# Altium PCB omnibothub-core.PcbDoc (part 1 of 2)
Units mil, origin at the board's own origin, x right, y up, seen from the top; angles counter-clockwise.
Board outline 2561.98 x 2230.57 mil, 4 copper layers (Top Layer, Mid-Layer 1, Mid-Layer 2, Bottom Layer); 77 components, 73 nets, 319 pads, 135 vias.
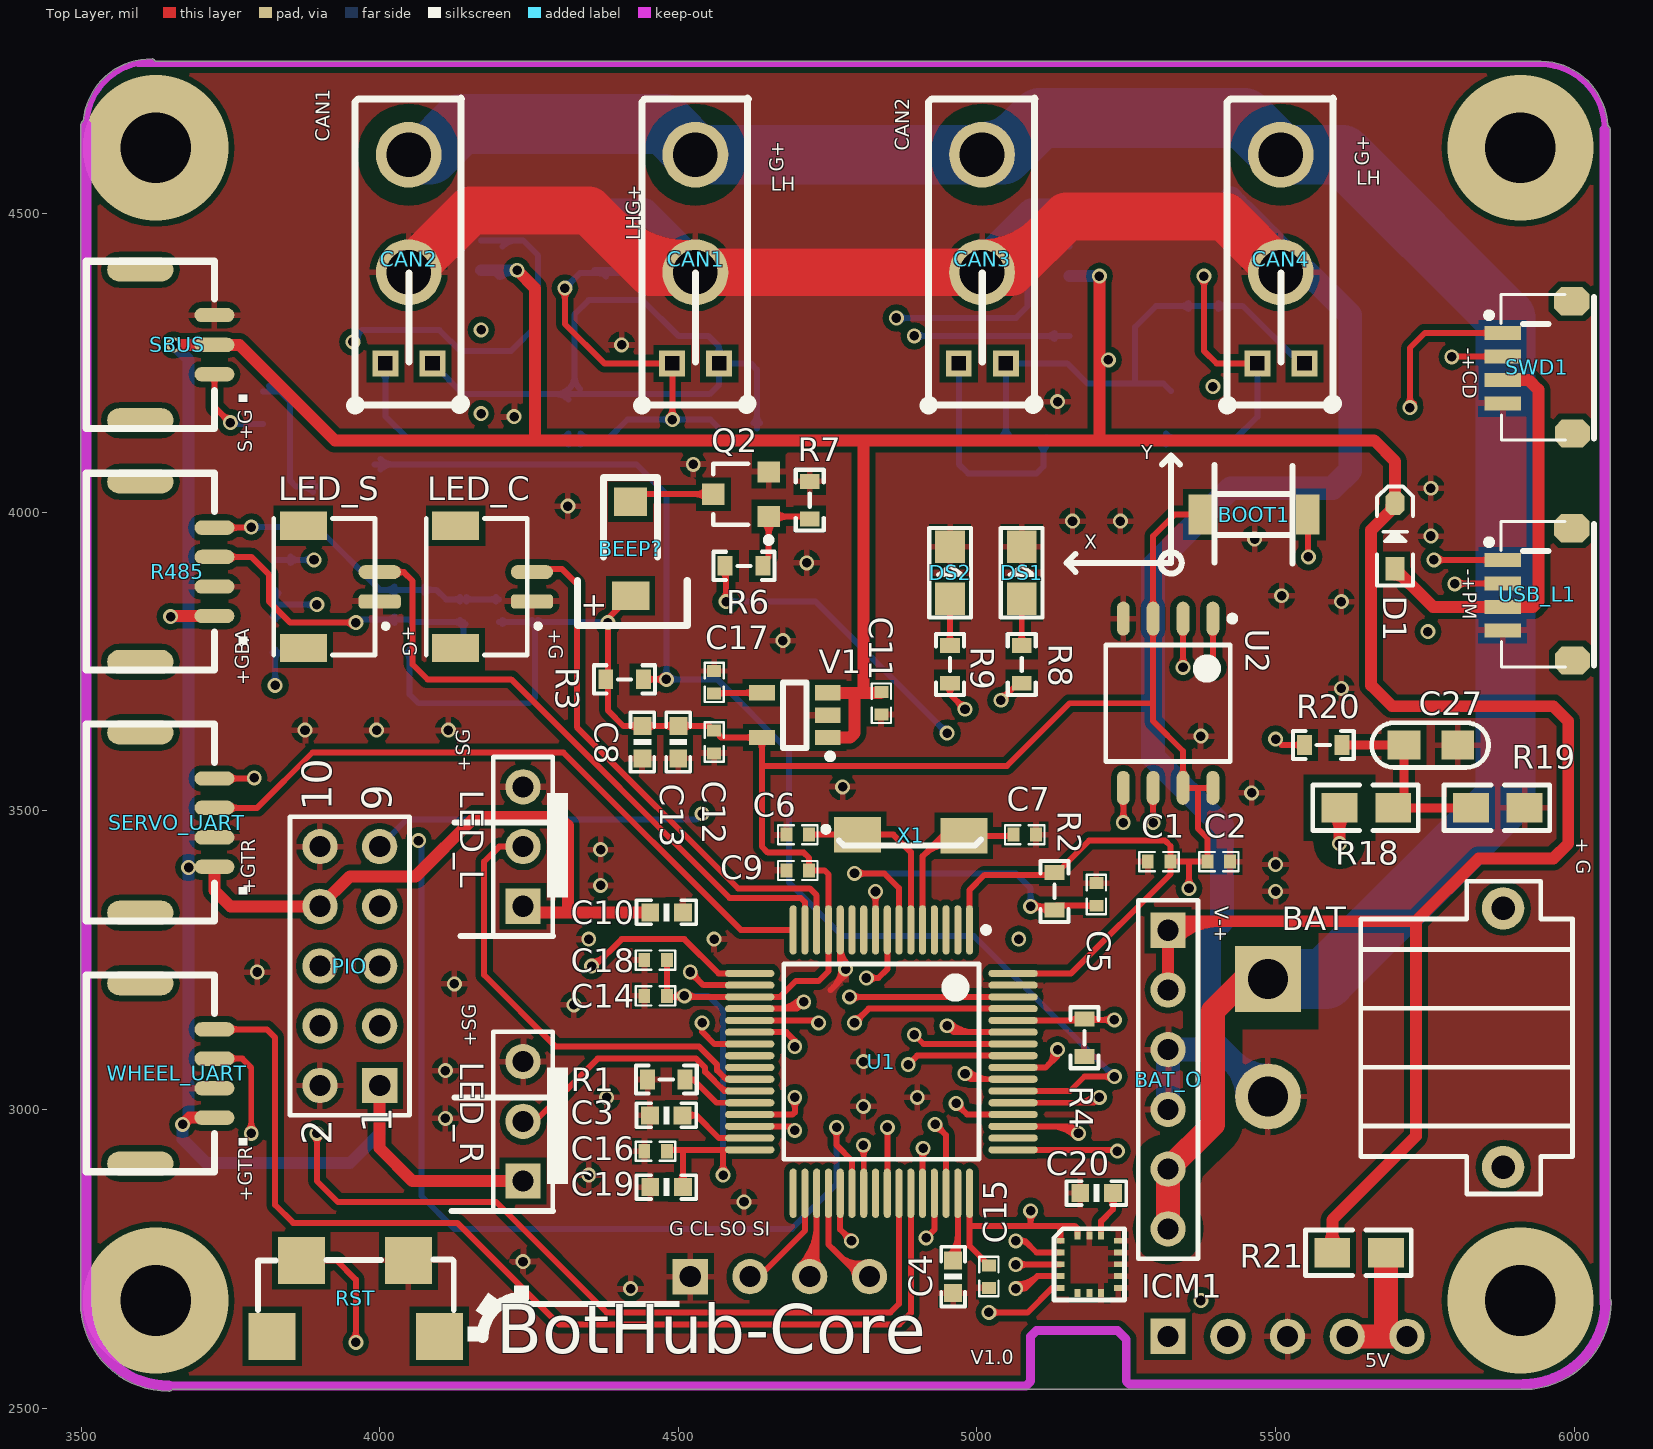
[diagram p0: Top Layer view]
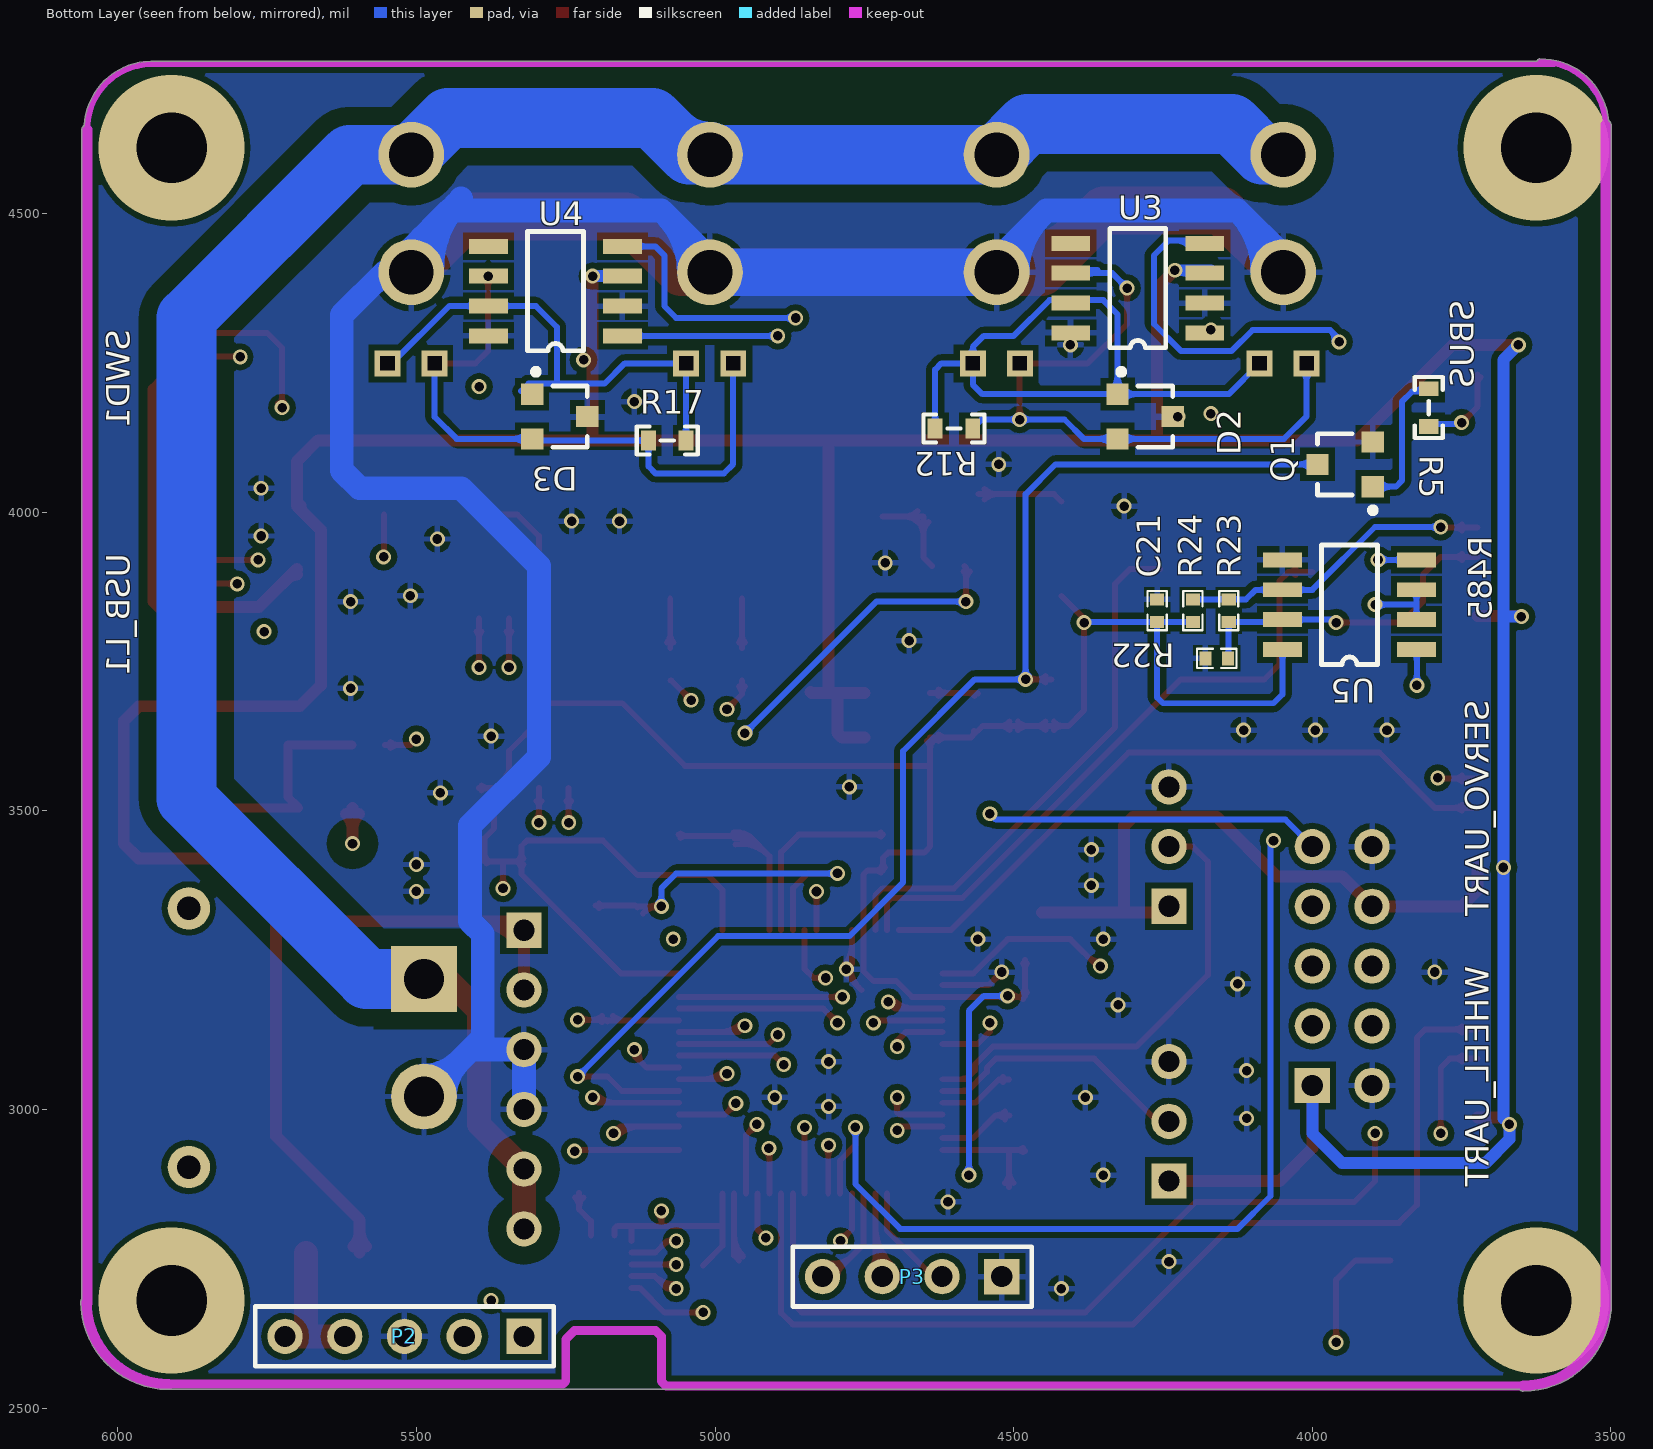
[diagram p1: Bottom Layer view, seen from below]
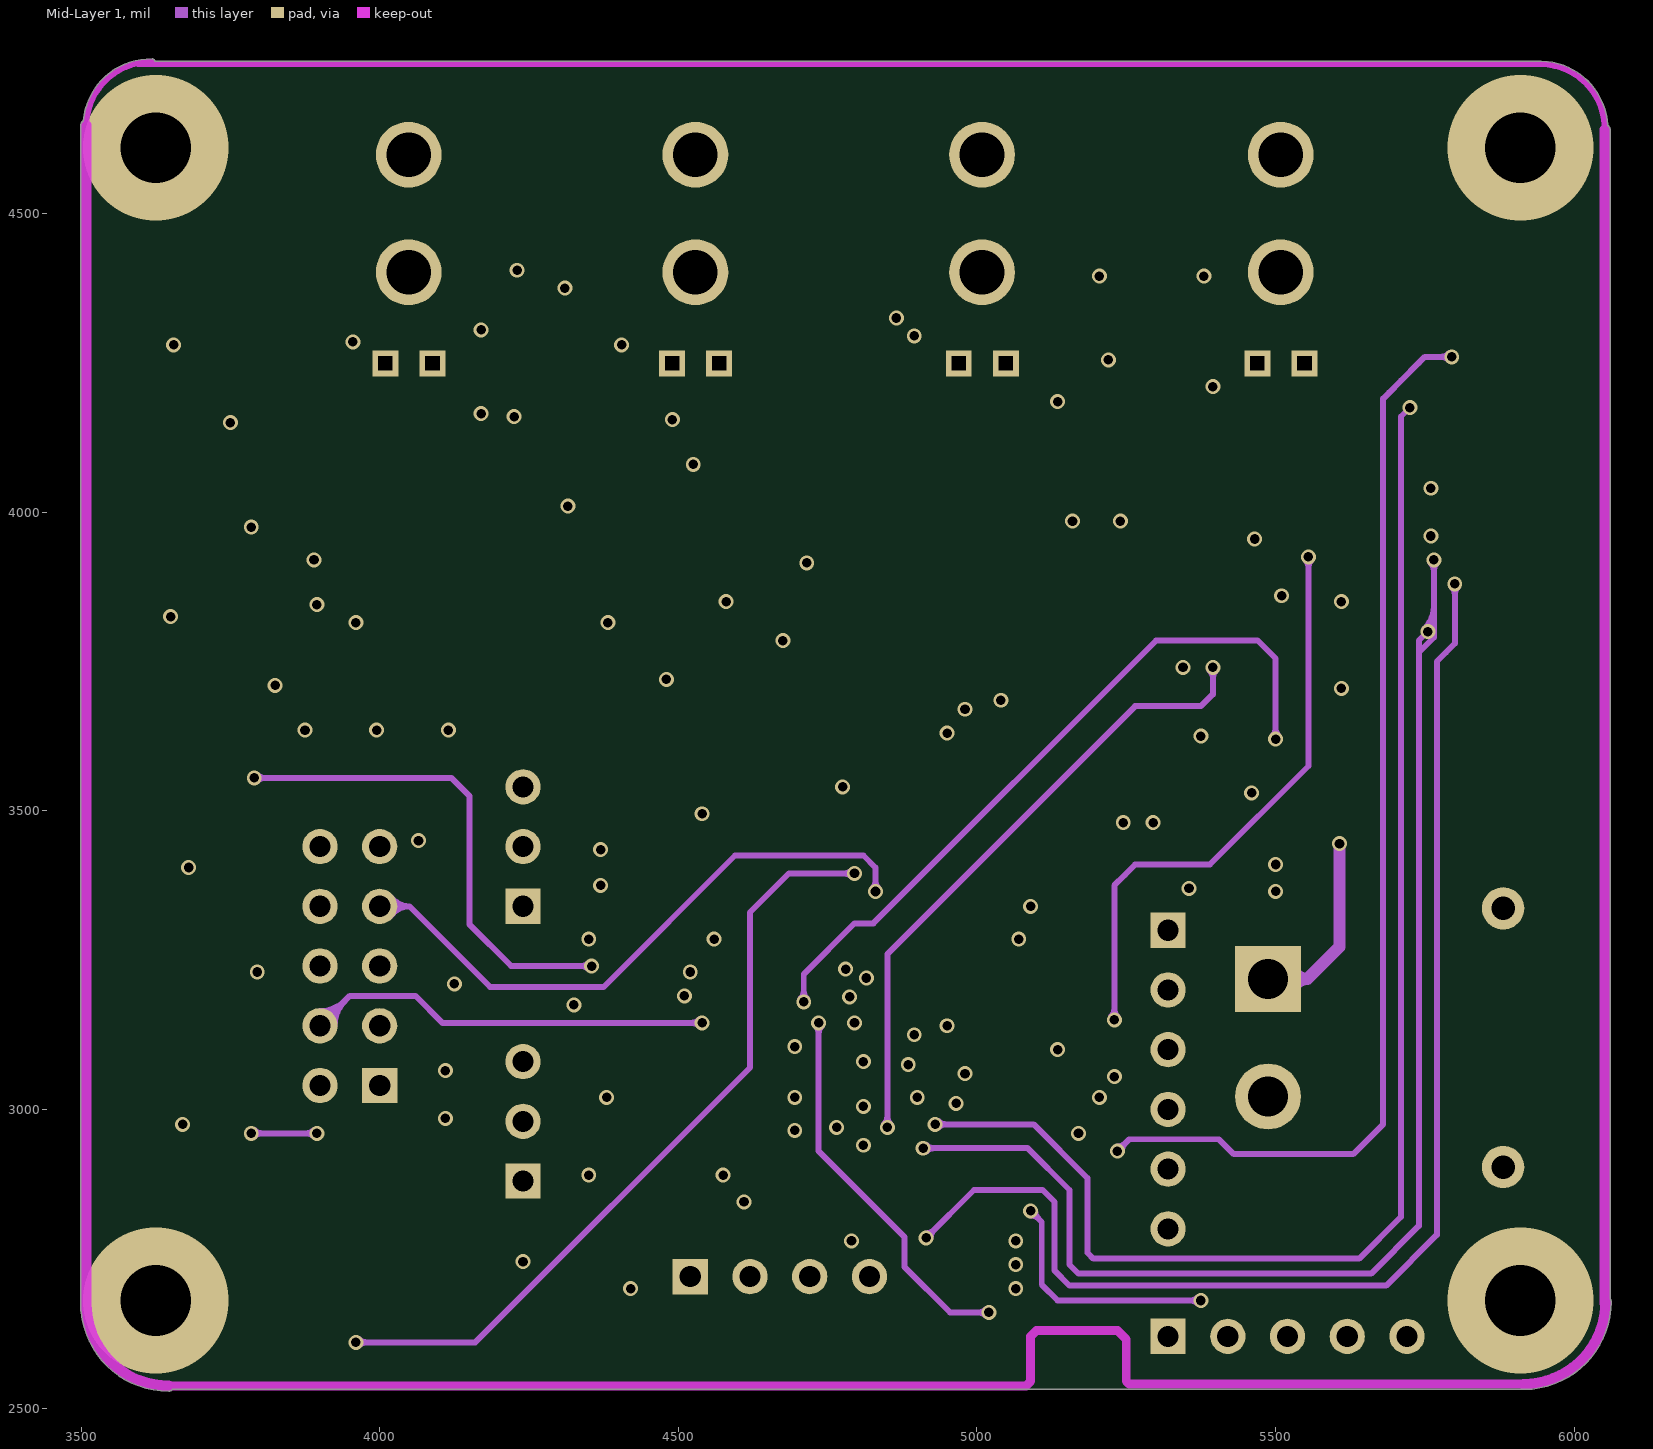
[diagram p2: Mid-Layer 1]
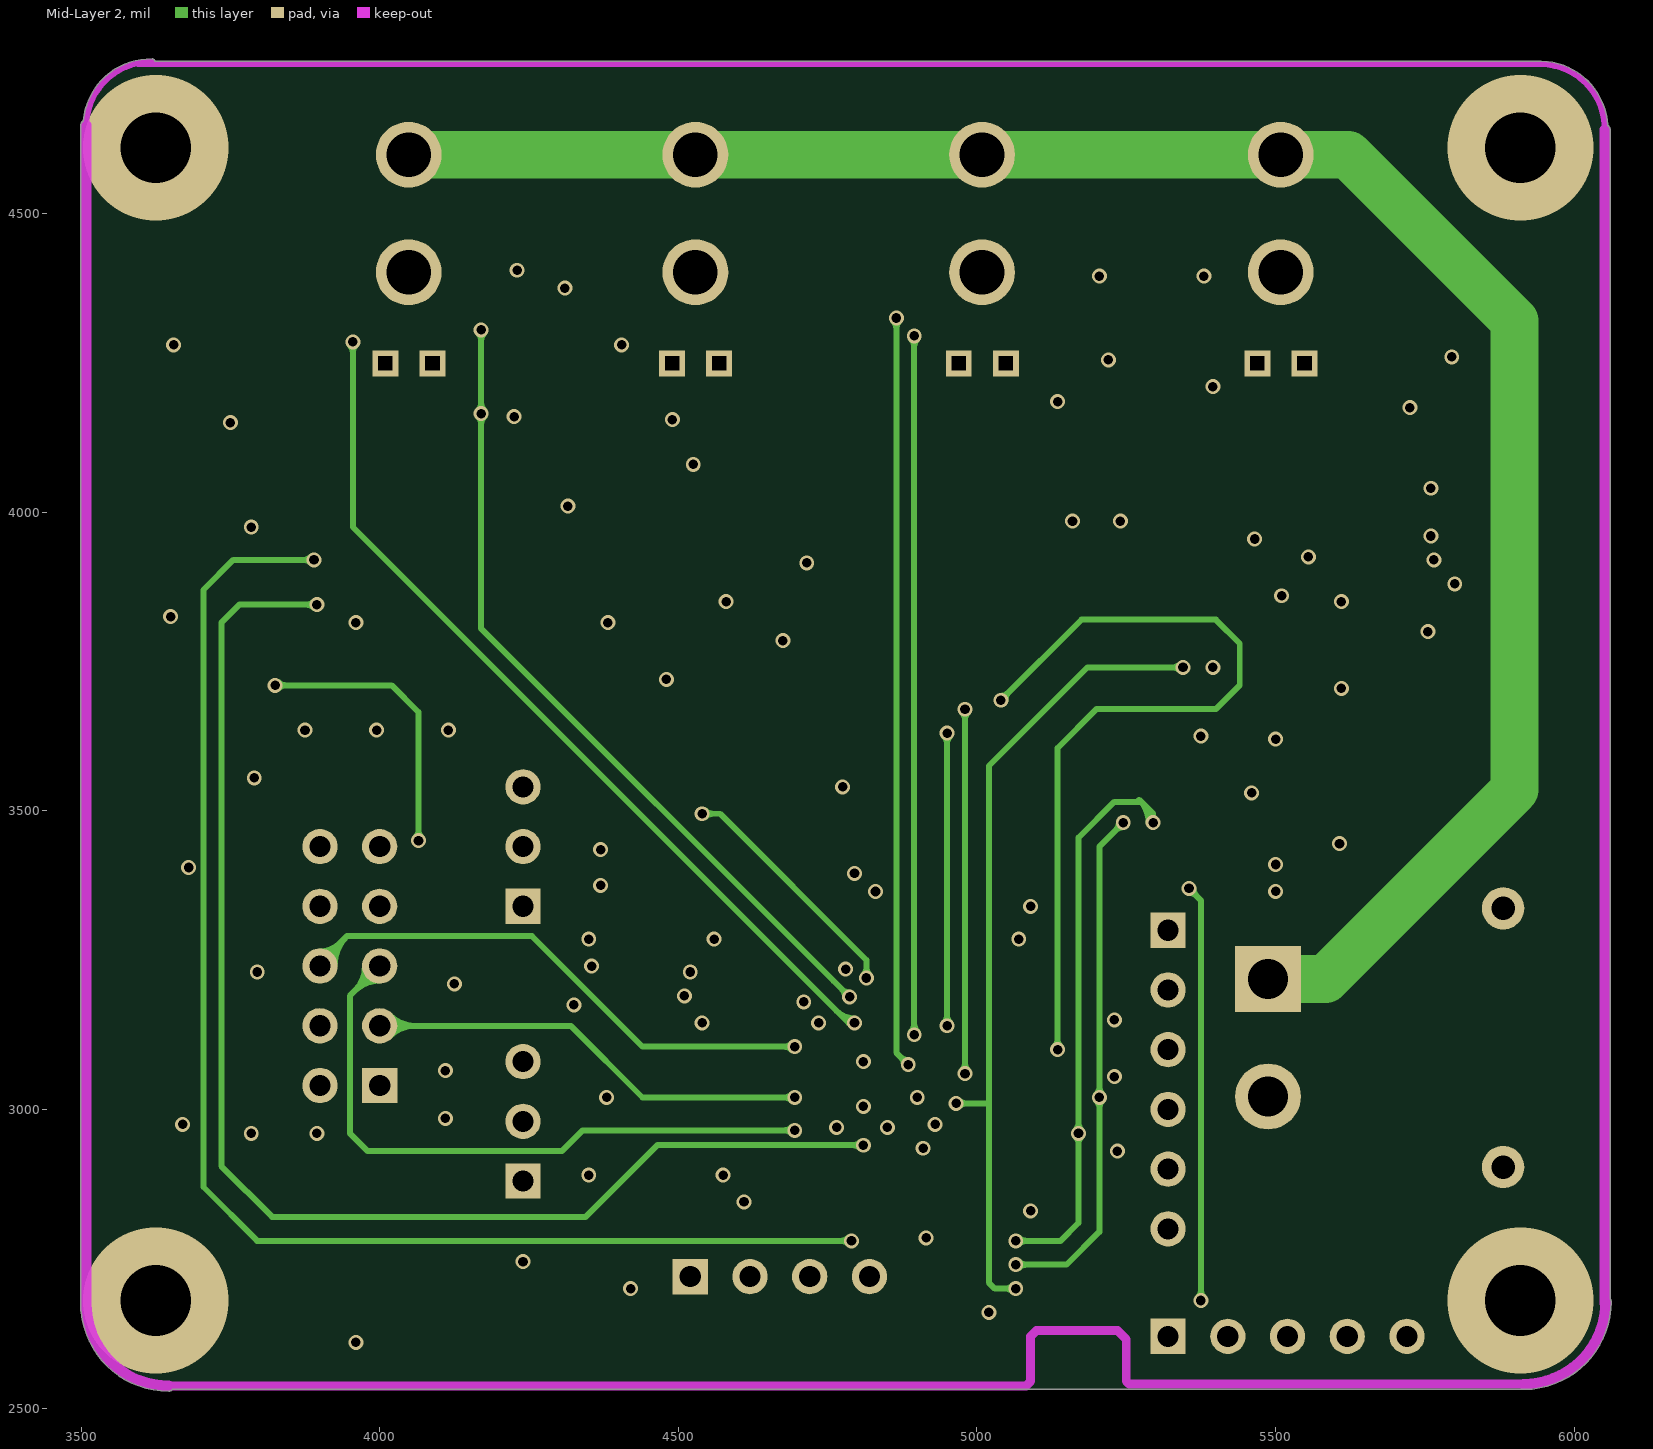
[diagram p3: Mid-Layer 2]
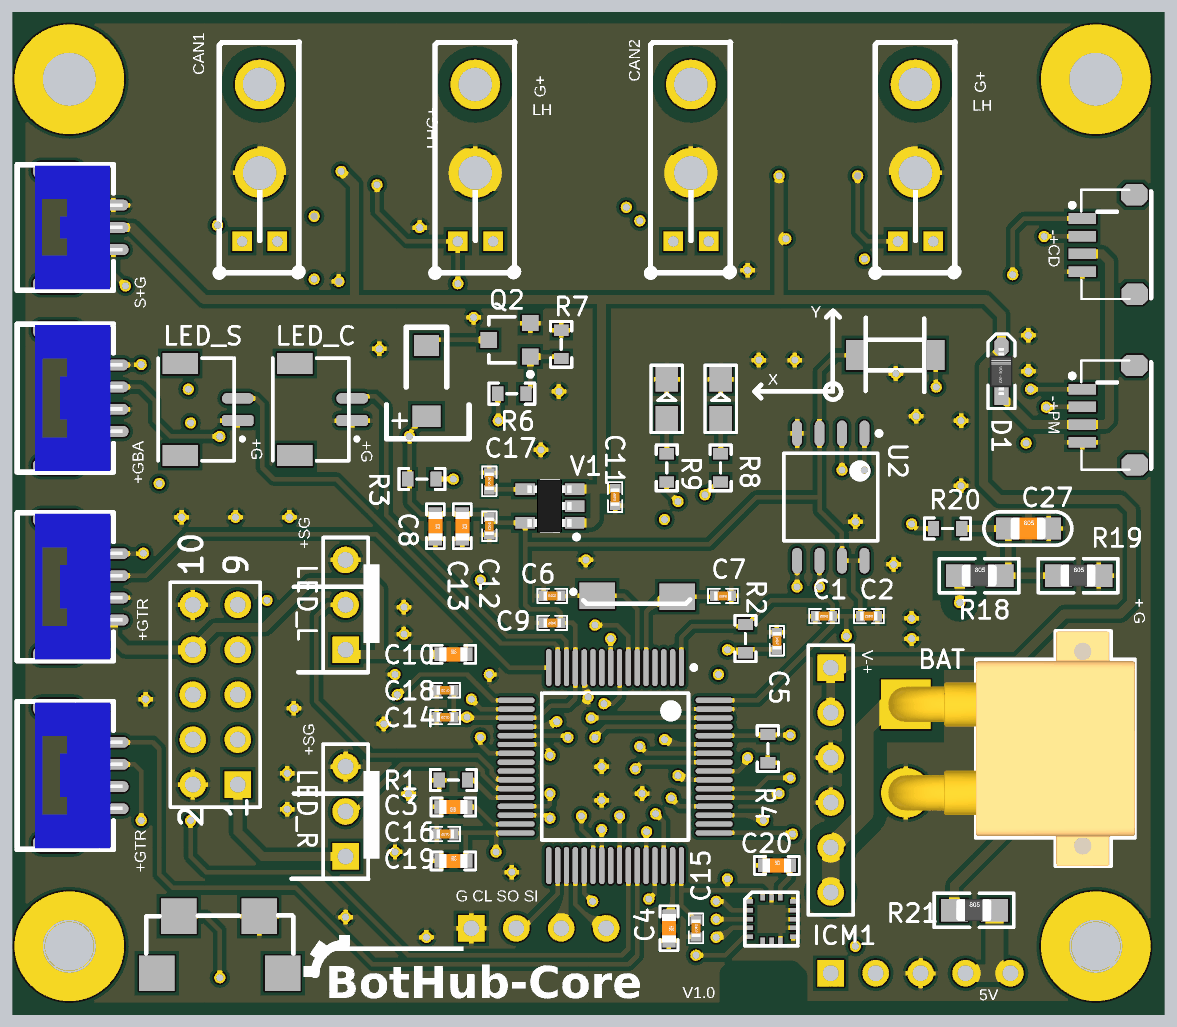
[diagram p5: 3D render of the assembled board from above, using the file's embedded part models]

## Layer stack, top to bottom
Top Layer: signal copper 1.4
Dielectric: dielectric 12.6, FR-4, Dk 4.8
Mid-Layer 1: signal copper 1.4
Dielectric: dielectric 12.6, FR-4, Dk 4.8
Mid-Layer 2: signal copper 1.4
Dielectric: dielectric 12.6, FR-4, Dk 4.8
Bottom Layer: signal copper 1.4

## Board outline
3500.51,2660.23 cw(c3508.72,2663.81) 3499.76,2663.81 3499.76,4647.84 cw(c3508.72,4647.84) 3504.1,4655.51 cw(c3616.73,4645.79) 3618.89,4758.82 cw(c3618.79,4753.81) 3623.66,4755.01 5944.13,4754.94 cw(c5945,4750) 5945.1,4755.01 cw(c5942.94,4641.98) 6055.86,4647.61 cw(c6051.26,4639.92) 6060.21,4639.92 6060.21,2682.81 cw(c6052.8,2677.8) 6061.75,2677.8 cw(c5915,2677.8) 5929.5,2531.77 cw(c5925.98,2540) 5925.98,2531.05 3653.01,2531.05 cw(c3646.51,2537.2) 3646.51,2528.25 cw(c3646.51,2675)

## Design rules (kind name [scope] priority, off if disabled: settings)
Clearance Clearance_3 [(InPolygon) vs InNet('VCC_DJ')] p1: gap=30
Clearance Clearance_2 [(InPolygon) vs InNet('POWER')] p2: gap=30
Clearance Clearance_1 [(InPolygon)] p3: gap=10
Clearance [All] p4: gap=6
PolygonConnect [All] p1: connectstyle=Relief reliefconductorwidth=10 reliefentries=4 polygonreliefangle="90 Angle"
RoutingVias [All] p1: holewidth=28 width=50 viastyle="Through Hole" minholewidth=16 minwidth=25 maxholewidth=28 maxwidth=50
SilkscreenOverComponentPads [All] p1: minsilkscreentomaskgap=10
SolderMaskExpansion [All] p1: expansion=4
Width [All] p1: maxlimit=100 minlimit=10 preferedwidth=10 midlayer1_maxwidth=80 midlayer2_maxwidth=80 minimp=50.000000 maximp=50.000000 favimp=50.000000
27 further rules are at their usual default settings.

## Components (designator, comment, footprint, x,y, rotation, side; value= is the part's Value field where it differs from the comment)
BAT "Header 2" AMASS-XT30PW-M 5820,3120 r270 top
BAT_O "Header 6" HDR1X6 5320,3300 r270 top
BEEP? "BEEP" DET402 4420,3860 r90 top
BOOT1 "Header 2" 663*4*2.0/2.5MM 5500,3980 r180 top
C1 "0.1UF" "C 0402" 5305,3415 r180 top
C2 "1UF" "C 0402" 5405,3415 r180 top
C3 "2.2UF" C0603 4480,2990 r180 top
C4 "2.2UF" C0603 4960,2720 r270 top
C5 "10NF" "C 0402" 5200,3360 r270 top
C6 "20PF" "C 0402" 4700,3460 r0 top
C7 "20PF" "C 0402" 5080,3460 r180 top
C8 "0.1UF" C0603 4440,3615 r270 top
C9 "0.1UF" "C 0402" 4700,3400 r180 top
C10 "10uF" C0603 4480,3330 r0 top
C11 "0.1uF" "C 0402" 4840,3680 r90 top
C12 "0.1uF" "C 0402" 4560,3615 r270 top
C13 "10uF" C0603 4500,3615 r270 top
C14 "0.1UF" "C 0402" 4461.97,3190 r180 top
C15 "0.1UF" "C 0402" 5020,2720 r270 top
C16 "0.1UF" "C 0402" 4461.97,2930 r180 top
C17 "0.1uF" "C 0402" 4560,3715 r90 top
C18 "0.1UF" "C 0402" 4461.97,3250 r180 top
C19 "0.1UF" C0603 4480,2870 r0 top
C20 "0.1UF" C0603 5200,2860 r0 top
C21 "0.1uF" "C 0402" 4260,3835 r270 bottom
C27 "100uF" C0805 5760,3610 r0 top
CAN1 "Header 4" "AMASS-XT30(2+2)PW-M_V2 - LI" 4240,4500 r270 top
CAN2 "Header 4" "AMASS-XT30(2+2)PW-M_V2 - LI" 3760,4500 r270 top
CAN3 "Header 4" "AMASS-XT30(2+2)PW-M_V2 - LI" 4720,4500 r270 top
CAN4 "Header 4" "AMASS-XT30(2+2)PW-M_V2 - LI" 5220,4500 r270 top
D1 "BAT54WS" SOD-323 5700,3960 r270 top
D2 "PESD1CAN" SOT-23 4280,4160 r270 bottom
D3 "PESD1CAN" SOT-23 5260,4160 r270 bottom
DS1 "LED1" SMDLED 5074.94,3854.97 r90 top
DS2 "LED1" SMDLED 4954.94,3854.97 r90 top
ICM1 "ICM20602" ICM20602 5140,2780 r0 top
LED_C "Header 2" GH1.25-2P 4255,3875 r90 top
LED_L "Header 3" HDR1X3 4240,3340 r90 top
LED_R "Header 3" HDR1X3 4240,2880 r90 top
LED_S "Header 2" GH1.25-2P 4000,3875 r90 top
P2 "Header 5" HDR1X5 5320,2620 r0 bottom
P3 "Header 4" HDR1X4 4520,2720 r0 bottom
PIO "Header 5X2" HDR2X5 4000,3040 r90 top
Q1 "S8050" SOT-23R 3940,4080 r90 bottom
Q2 "S8050" SOT-23R 4610,4030 r90 top
R1 "10K" R0603 4480,3050 r0 top
R2 "10K" R0603 5130,3365 r90 top
R3 "10K" R0603 4410,3720 r180 top
R4 "10K" R0603 5180,3120 r90 top
R5 "560R" R0603 3805,4175 r270 bottom
R6 "1K" R0603 4610,3910 r180 top
R7 "10K" R0603 4720,4020 r270 top
R8 "100R" R0603 5074.94,3744.97 r90 top
R9 "100R" R0603 4954.94,3744.97 r90 top
R12 "120R" R0603 4600,4140 r0 bottom
R17 "120R" R0603 5080,4120 r180 bottom
R18 "100K" R0805 5652,3505 r0 top
R19 "10K" R0805 5872,3505 r0 top
R20 "560R" R0603 5580,3610 r0 top
R21 "10K" R0805 5640,2760 r0 top
R22 "360R" "R 0402" 4160,3755 r180 bottom
R23 "120R" "R 0402" 4140,3835 r90 bottom
R24 "360R" "R 0402" 4200,3835 r270 bottom
R485 "Header 4" JST_GH_V4 3508.72,3900 r90 top
RST "Header 2" KEY_SAD 3820,2620 r0 top
SBUS "Header 3" JST_GH_V3 3508.72,4280 r90 top
SERVO_UART "Header 4" JST_GH_V4 3508.72,3480 r90 top
SWD1 "Header 4" "SH1.0-4P - UP" 5880,4300 r270 top
U1 "STM32F405RGT6" LQFP64_M 4840,3080 r270 top locked
U2 "W25X16" W25Q32FVZPIG 5320,3680 r270 top
U3 "TJA1050" SOP-8 4180,4300 r0 bottom
U4 "TJA1050" SOP-8 5155,4295 r0 bottom
U5 "SP3485" SOP-8 3825.59,3770 r0 bottom
USB_L1 "Header 4" "SH1.0-4P - UP" 5880,3920 r270 top
V1 "RT9193-3.3/LP2985/SPX3819" SOT23-5 4695,3660 r0 top
WHEEL_UART "Header 4" JST_GH_V4 3508.72,3060 r90 top
X1 "8MHZ" PXCL 4800,3460 r270 top

## Footprints (in the part's own frame and the unit in brackets; to place one, negate y for a bottom-side part, rotate by r counter-clockwise, add the part's x,y. Pads: shape width x height; smd on the part's side, far side on the other; paste and mask are expansions set on the pad)
663*4*2.0/2.5MM [mil] "小龟按键"
  rect 39.37x66.93 smd: 1(126,-16) 2(-54,-16)
  silkscreen extent -28,-99 102,66
"AMASS-XT30(2+2)PW-M_V2 - LI" [mm] "TH, 4-Leads, Body 15.5x12.53mm"
  round 2.8 hole 1.9: 1(-2.5,7.33) 2(2.5,7.33)
  rect 1.1x1.1 hole 0.6 square: 3(6.376,8.34) 4(6.376,6.34)
  silkscreen extent -4.9,5.05 8.17,9.58
AMASS-XT30PW-M [mm] "TH, 4-Leads, Body 13.95x13.3mm"
  rect 2.8x2.8 hole 1.7: 1(-2.5,-8.45)
  round 2.8 hole 1.7: 2(2.5,-8.45)
  round 1.8 hole 1: MP1(-5.5,1.55) MP2(5.5,1.55)
  silkscreen extent -6.65,-4.5 6.65,4.5, body extent -6.65,-9.45 6.65,4.5, height 5.05
C0603 [mil]
  rect 30x30 smd: 1(-27,0) 2(27.5,-0.06)
  silkscreen extent -50,-20 50,20, body extent -31,-16 31,16, height 12
C0805 [mil]
  rect 55x48 smd: 1(-45,0) 2(45,0)
  silkscreen extent -99,-38 97,37, body extent -40,-25 39,25, height 31
"C 0402" [mil]
  rect 20x23.62 smd: 1(-19,0) 2(19,0)
  silkscreen extent -33,-16 33,16, body extent -20,-10 20,10, height 20
DET402 [mm]
  rect 1.2x1.6 smd: 1(0,-0.002)
  rect 1.2x1.4 smd: 2(4,0)
  silkscreen extent -1.27,-2.41 5.03,2.26
GH1.25-2P [mm]
  rrect50% 0.6x1.8 smd: 1(-0.625,0)
  oval 0.6x1.8 smd: 2(0.625,0)
  rect 1.2x2 smd: A(-2.6,3.246) A(2.6,3.246)
  silkscreen extent -2.9,-0.33 2.9,4.5
HDR1X3 [mm] "Connector; Header; 3 Position"
  rect 1.5x1.5 hole 0.9: 1(0,0)
  round 1.5 hole 0.9: 2(2.54,0) 3(5.08,0)
  silkscreen extent -1.27,-1.27 6.35,1.27
HDR1X4 [mm]
  rect 1.5x1.5 hole 0.9: 1(0,0)
  round 1.5 hole 0.9: 2(2.54,0) 3(5.08,0) 4(7.62,0)
  silkscreen extent -1.27,-1.27 8.89,1.27
HDR1X5 [mm] "Connector; Header; 5 Position"
  rect 1.5x1.5 hole 0.9: 1(0,0)
  round 1.5 hole 0.9: 2(2.54,0) 3(5.08,0) 4(7.62,0) 5(10.16,0)
  silkscreen extent -1.27,-1.27 11.43,1.27
HDR1X6 [mm] "Connector; Header; 6 Position"
  rect 1.5x1.5 hole 0.9: 1(0,0)
  round 1.5 hole 0.9: 2(2.54,0) 3(5.08,0) 4(7.62,0) 5(10.16,0) 6(12.7,0)
  silkscreen extent -1.27,-1.27 13.97,1.27
HDR2X5 [mm] "Connector; Header; 5x2 Position"
  rect 1.5x1.5 hole 0.9: 1(0,0)
  round 1.5 hole 0.9: 2(0,2.54) 3(2.54,0) 4(2.54,2.54) 5(5.08,0) 6(5.08,2.54) 7(7.62,0) 8(7.62,2.54) 9(10.16,0) 10(10.16,2.54)
  silkscreen extent -1.27,-1.27 11.43,3.81
ICM20602 [mm]
  rect 0.35x0.25 smd: 1(0,0) 2(0,-0.5) 3(0,-1) 4(0,-1.5) 5(0,-2) 9(2.45,-2) 10(2.45,-1.5) 11(2.45,-1) 12(2.45,-0.5) 13(2.45,0)
  rect 0.25x0.35 smd: 6(0.725,-2.225) 7(1.225,-2.225) 8(1.725,-2.225) 14(1.725,0.225) 15(1.225,0.225) 16(0.725,0.225)
  silkscreen extent -0.28,-2.51 2.72,0.51, body extent -0.38,-2.62 2.82,0.61, height 0.75
JST_GH_V3 [mil]
  rrect100% 24x67 smd: 1(-49.21,-214.57) 2(0,-214.57) 3(50,-214.57)
  rrect100% 40x111 smd: GND(-125.98,-90.55) GND(126,-90.55)
  silkscreen extent -140,-215 140,0, body extent -138,-235 138,-40, height 165
JST_GH_V4 [mil]
  rrect100% 24x67 smd: 1(-73.82,-214.57) 2(-24.61,-214.57) 3(25,-214.57) 4(74,-214.57)
  rrect100% 40x111 smd: GND(-150.59,-90.55) GND(151,-90.55)
  silkscreen extent -164,-215 165,0, body extent -162,-235 163,-40, height 165
KEY_SAD [mm]
  rect 2x2 smd: 1(1.245,3.226) 2(5.791,3.226) ""(0,0) ""(7.112,0)
  silkscreen extent -0.61,1.12 7.72,3.28
LQFP64_M [mm] "Thin QFP, 64-Leads, Body 10x10mm, Pitch 0.5mm, IPC Low Density"
  oval 2.1x0.3 smd: 1(-5.6,3.75) 2(-5.6,3.25) 3(-5.6,2.75) 4(-5.6,2.25) 5(-5.6,1.75) 6(-5.6,1.25) 7(-5.6,0.75) 8(-5.6,0.25) 9(-5.6,-0.25) 10(-5.6,-0.75) 11(-5.6,-1.25) 12(-5.6,-1.75) 13(-5.6,-2.25) 14(-5.6,-2.75) 15(-5.6,-3.25) 16(-5.6,-3.75) 33(5.6,-3.75) 34(5.6,-3.25) 35(5.6,-2.75) 36(5.6,-2.25) 37(5.6,-1.75) 38(5.6,-1.25) 39(5.6,-0.75) 40(5.6,-0.25) 41(5.6,0.25) 42(5.6,0.75) 43(5.6,1.25) 44(5.6,1.75) 45(5.6,2.25) 46(5.6,2.75) 47(5.6,3.25) 48(5.6,3.75)
  oval 0.3x2.1 smd: 17(-3.75,-5.6) 18(-3.25,-5.6) 19(-2.75,-5.6) 20(-2.25,-5.6) 21(-1.75,-5.6) 22(-1.25,-5.6) 23(-0.75,-5.6) 24(-0.25,-5.6) 25(0.25,-5.6) 26(0.75,-5.6) 27(1.25,-5.6) 28(1.75,-5.6) 29(2.25,-5.6) 30(2.75,-5.6) 31(3.25,-5.6) 32(3.75,-5.6) 49(3.75,5.6) 50(3.25,5.6) 51(2.75,5.6) 52(2.25,5.6) 53(1.75,5.6) 54(1.25,5.6) 55(0.75,5.6) 56(0.25,5.6) 57(-0.25,5.6) 58(-0.75,5.6) 59(-1.25,5.6) 60(-1.75,5.6) 61(-2.25,5.6) 62(-2.75,5.6) 63(-3.25,5.6) 64(-3.75,5.6)
  silkscreen extent -5.72,-4.15 4.15,4.58, body extent -5,-5 5,5, height 1.6
PXCL [mm]
  rect 1.5x2 smd: 1(0,0) 2(0.051,4.521)
  silkscreen extent -0.34,-1.45 0.46,5.26
R0603 [mil] "ÌùÆ"
  rect 25x33 smd: 1(-31.5,0) 2(31.5,0)
  silkscreen extent -51,-24 51,24, body extent -32,-16 32,16, height 20
R0805 [mil]
  rect 60x50 smd: 1(45,0) 2(-45,0)
  silkscreen extent -90,-38 87,38, body extent -41,-24 38,25, height 31
"R 0402" [mil]
  rect 20x23.62 smd: 1(-19,0) 2(19,0)
  silkscreen extent -33,-16 33,16, body extent -20,-10 20,10, height 12
"SH1.0-4P - UP" [mm]
  rect 0.6x1.55 smd: 1(0,0) 2(1,0) 3(2,0) 4(3,0)
  oct 1.2x1.5 smd: 1.(4.279,2.972) A(-1.346,2.946)
  silkscreen extent -1.63,-0.7 4.55,3.89
SMDLED [mm]
  rect 1.4x1.27 smd: 1(0.001,-0.002) 2(2.211,-0.002)
  silkscreen extent -0.8,-0.89 3.01,0.89
SOD-323 [mm] "1.8x1.3X0.9mm（长宽高，不包括引脚）"
  rect 1x0.8 smd: 1(1.4,0)
  oct 1x0.8 smd: 2(-1.4,0)
  silkscreen extent -2.11,-0.76 2.11,0.76, body extent -1.31,-0.67 1.34,0.63, height 1
SOP-8 [mil]
  rect 65x25 smd: 1(0,0) 2(0,-50) 3(0,-100) 4(0,-150) 5(224.41,-150) 6(224.41,-100) 7(224.41,-50) 8(224.41,0)
  silkscreen extent 65,-175 159,25
SOT23-5 [mm]
  rect 1.1x0.65 smd: 1(1.4,-0.95) 2(1.4,0) 3(1.4,0.95) 4(-1.4,0.95) 5(-1.4,-0.95)
  silkscreen extent -0.5,-1.87 1.63,1.4, body extent -1.28,-1.5 1.22,1.5, height 1.05
SOT-23 [mm]
  rect 0.9x0.95 smd: 1(-0.95,-1.175) 2(0.95,-1.175) 3(0,1.175)
  silkscreen extent -2.03,-1.14 1.3,1.18
SOT-23R [mm]
  rect 0.9x0.95 smd: 1(0.95,-1.048) 2(-0.95,-1.048) 3(0,1.302)
  silkscreen extent -2.07,-1.17 1.3,1.3
W25Q32FVZPIG [mm] "SOP, 8-Leads, Body 5.3x5.3mm (max), Pitch 1.27mm, IPC Medium Density"
  oval 1.45x0.55 smd: 1(-3.6,1.905) 2(-3.6,0.635) 3(-3.6,-0.635) 4(-3.6,-1.905) 5(3.6,-1.905) 6(3.6,-0.635) 7(3.6,0.635) 8(3.6,1.905)
  silkscreen extent -3.72,-2.65 2.47,2.86, body extent -2.64,-2.64 2.64,2.64, height 2.65

## Part data
BAT BOOT1 LED_C LED_S RST: "Header, 2-Pin"
BAT_O: "Header, 6-Pin"
C1 C2 C5 C8 C9 C10 C12 C13 C14 C15 C16 C18 C19 C20 C27: library part CAP, "Capacitor"
C3 C4: library part CAP1, "胆电容"
C6 C7: library part C2, "0805"
C11 C17 C21: library part Capacitor, "普通电容"
CAN1 CAN2 CAN3 CAN4 P3 R485 SERVO_UART SWD1 USB_L1 WHEEL_UART: "Header, 4-Pin"
D1: library part BAT54, "单肖特基二极管"
DS1 DS2: library part LED2, "Typical RED, GREEN, YELLOW, AMBER GaAs LED"
LED_L LED_R SBUS: "Header, 3-Pin"
P2: "Header, 5-Pin"
PIO: "Header, 5-Pin, Dual row"
Q1 Q2: library part NPN, "8050/BCW846/BCW847"
R1 R2 R3 R4 R5 R6 R7 R8 R9 R12 R17 R18 R19 R20 R21 R22 R23 R24: library part Res2, "0603"
U2: "W25X16;SST25VF016;MX25L1605"
U3 U4: library part SN65HVD230D
U5: library part MAX3485
V1: "降压IC"
X1: library part XTAL, "Crystal Oscillator"

## Via types
v1: diameter 25, hole 16, Top Layer to Bottom Layer, 129 vias
v2: diameter 244.09, hole 118.11, Top Layer to Bottom Layer, 4 vias
v3: diameter 244.09, hole 108.27, Top Layer to Bottom Layer, 2 vias

## Nets (pads, with @x,y where several pads share a name; then routed paths per layer and width w, separated by ;. In a path a pad name is that pad's centre, name@x,y a point inside that pad or via, vN(x,y) a via of type N, cw(c..) or ccw(c..) an arc to the next point about the centre after c; other vN are vias at no path point)
3.3V: BEEP?.1 BOOT1.1 C1.1 C2.2 C8.1 C9.1 C12.1 C13.1 C14.1 C15.1 C16.1 C18.1 C19.2 C21.2 ICM1.1 ICM1.16 R2.2 R3.2 R24.2 U1.1 U1.13 U1.19 U1.32 U1.48 U1.64 U2.3 U2.7 U2.8 U5.8 V1.5 | length 7389.5
  Top Layer w10: BEEP?.1@4420.06,3860 4382.5,3822.44 4382.5,3720.06 4382.5,3667.5 4408,3642 C8.1@4440,3642 C13.1@4500,3642 4552,3642 4571.4,3622.6 V1.5@4639.88,3622.6 4639.88,3575 ; C8.1@4432.93,3634.93 ccw(c4415.86,3617.86) 4415.86,3642 ccw(c4415.86,3666.14) C8.1@4432.93,3649.07 ; C8.1@4447.07,3634.93 cw(c4464.14,3617.86) 4464.14,3642 cw(c4464.14,3666.14) C8.1@4447.07,3649.07 ; C14.1@4477.43,3195.35 ccw(c4468.9,3203.88) 4480.97,3203.88 ccw(c4493.04,3203.88) C14.1@4484.5,3195.35 ; C18.1@4477.43,3244.65 cw(c4468.9,3236.12) 4480.97,3236.12 cw(c4493.04,3236.12) C18.1@4484.5,3244.65 ; C16.1@4480.97,2930 4483.33,2932.36 4575,2932.36 ; C18.1@4480.97,3250 C14.1@4480.97,3190 4482.7,3188.27 U1.19@4619.53,3188.27 4670.03,3188.27 4696.77,3215 4735,3215 4751.42,3231.42 U1.13@4751.42,3300.47 ; C16.1@4484.5,2928.28 cw(c4494.37,2918.41) 4494.37,2932.36 ; C16.1@4484.5,2935.35 ccw(c4491.71,2942.55) 4491.71,2932.36 ; C14.1@4484.5,3184.65 cw(c4493.23,3175.93) 4493.23,3188.27 ; C14.1@4484.5,3191.72 ccw(c4492.85,3200.07) 4492.85,3188.27 ; C14.1@4487.71,3188.27 ccw(c4487.71,3212.29) v1@4504.7,3195.3 ; C13.1@4492.93,3634.93 ccw(c4475.86,3617.86) 4475.86,3642 ccw(c4475.86,3666.14) C13.1@4492.93,3649.07 ; 4496.08,3188.27 cw(c4496.08,3176.08) v1@4504.7,3184.7 ; C19.2@4500.43,2877.01 ccw(c4483.36,2894.08) 4507.5,2894.08 ccw(c4531.64,2894.08) C19.2@4514.57,2877.01 ; C13.1@4507.07,3634.93 cw(c4524.14,3617.86) 4524.14,3642 cw(c4524.14,3666.14) C13.1@4507.07,3649.07 ; C19.2@4507.5,2869.94 4507.5,2929.86 ; v1@4515.3,3184.7 cw(c4523.92,3176.08) 4523.92,3188.27 ; v1@4515.3,3195.3 ccw(c4532.29,3212.29) 4532.29,3188.27 ; C12.1@4566.79,3633.59 ccw(c4579.53,3632.54) 4570.5,3623.5 ; v1@4569.7,2895.3 ccw(c4556.89,2908.11) 4575,2908.11 ccw(c4593.11,2908.11) v1@4580.3,2895.3 ; v1(4575,2890) 4575,2932.36 ; U1.32@4619.53,2932.36 4575,2932.36 ; V1.5@4625.51,3617.09 ccw(c4612.2,3603.78) 4612.2,3622.6 ccw(c4612.2,3641.42) V1.5@4625.51,3628.11 ; V1.5@4634.37,3617.09 cw(c4621.06,3603.78) 4639.88,3603.78 cw(c4658.7,3603.78) V1.5@4645.39,3617.09 ; C9.1@4715.46,3405.35 ccw(c4706.93,3413.88) 4719,3413.88 ccw(c4731.07,3413.88) C9.1@4722.54,3405.35 ; C9.1@4722.54,3396.46 cw(c4731.07,3387.93) 4731.07,3400 cw(c4731.07,3412.07) C9.1@4722.54,3403.54 ; 4751.42,3251.42 U1.13@4751.42,3300.47 ; U1.48@4987.64,2859.53 4987.64,2805 ; U1.1@4987.64,3300.47 4987.64,3367.64 5012.5,3392.5 5130.06,3392.5 5187.56,3450 5315,3450 5324,3441 C1.1@5324,3415 ; C15.1@5020,2739 4987.64,2771.36 4987.64,2805 ; U1.64@5060.47,3227.64 5157.64,3227.64 5324,3394 C1.1@5324,3415 ; v1@5084.7,2824.7 cw(c5071.89,2811.89) 5090,2811.89 cw(c5108.11,2811.89) v1@5095.3,2824.7 ; v1(5090,2830) 5090,2805 ; ICM1.1@5140,2780 5140,2805 ; ICM1.16@5168.54,2788.86 5168.54,2800 5163.54,2805 5140,2805 ; U2.3@5290.88,3799.9 cw(c5280.93,3789.95) 5295,3789.95 cw(c5309.07,3789.95) U2.3@5299.12,3799.9 ; U2.3@5290.88,3843.57 ccw(c5280.93,3853.52) 5295,3853.52 ccw(c5309.07,3853.52) U2.3@5299.12,3843.57 ; C1.1@5320.46,3409.65 cw(c5311.93,3401.12) 5324,3401.12 cw(c5336.07,3401.12) C1.1@5327.54,3409.65 ; C1.1@5320.46,3420.35 ccw(c5311.93,3428.88) 5324,3428.88 ccw(c5336.07,3428.88) C1.1@5327.54,3420.35 ; C1.1@5327.54,3411.46 cw(c5336.07,3402.93) 5336.07,3415 cw(c5336.07,3427.07) C1.1@5327.54,3418.54 ; U2.7@5340.88,3560.1 ccw(c5330.93,3570.05) 5345,3570.05 ccw(c5359.07,3570.05) U2.7@5349.12,3560.1 ; U2.7@5349.12,3534.15 cw(c5359.07,3524.2) 5359.07,3538.27 cw(c5359.07,3552.33) U2.7@5349.12,3542.39 ; v1@5349.7,3375.3 ccw(c5336.89,3388.11) 5355,3388.11 ccw(c5373.11,3388.11) v1@5360.3,3375.3 ; v1(5355,3370) 5355,3415 ; BOOT1.1@5374,3996 5331,3996 5295,3960 U2.3@5295,3821.73 5295,3680 ; C2.2@5382.46,3411.46 ccw(c5373.93,3402.93) 5373.93,3415 ccw(c5373.93,3427.07) C2.2@5382.46,3418.54 ; C2.2@5382.46,3420.35 ccw(c5373.93,3428.88) 5386,3428.88 ccw(c5398.07,3428.88) C2.2@5389.54,3420.35 ; U2.8@5390.88,3534.15 ccw(c5380.93,3524.2) 5380.93,3538.27 ccw(c5380.93,3552.33) U2.8@5390.88,3542.39 ; U2.8@5395,3538.27 5370,3538.27 ; 4639.88,3575 5050,3575 5155,3680 5295,3680 ; 4639.88,3575 4639.88,3440.12 4650,3430 4710,3430 4719,3421 C9.1@4719,3400 4745,3400 4751.42,3393.58 U1.13@4751.42,3300.47 ; 4987.64,2805 5090,2805 ; 5090,2805 5140,2805 ; 5295,3680 5295,3650 5345,3600 U2.7@5345,3538.27 5370,3538.27 ; C1.1@5324,3415 5355,3415 ; 5355,3415 C2.2@5386,3415 5386,3454 5370,3470 5370,3538.27
  Mid-Layer 1 w10: v1@5090,2822.5 cw(c5090,2804.39) 5102.8,2817.2 cw(c5115.61,2830) v1@5097.5,2830 ; v1(5090,2830) 5108.51,2811.49 5108.51,2706.49 5135,2680 v1(5375,2680) ; v1@5369.7,2674.7 ccw(c5356.89,2661.89) 5356.89,2680 ccw(c5356.89,2698.11) v1@5369.7,2685.3
  Mid-Layer 2 w10: v1@5355,3362.5 cw(c5355,3344.39) 5367.8,3357.2 cw(c5380.61,3370) v1@5362.5,3370 ; v1(5355,3370) 5375,3350 v1(5375,2680) ; v1@5369.7,2685.3 ccw(c5356.89,2698.11) 5375,2698.11 ccw(c5393.11,2698.11) v1@5380.3,2685.3
  Bottom Layer w10: U5.8@4044.7,3764.7 cw(c4031.89,3751.89) 4050,3751.89 cw(c4068.11,3751.89) U5.8@4055.3,3764.7 ; U5.8@4050,3770 4050,3695 4065,3680 4250,3680 4260,3690 C21.2@4260,3816 ; R24.2@4200,3816 C21.2@4260,3816 ; R24.2@4205.35,3812.46 cw(c4213.88,3803.93) 4213.88,3816 cw(c4213.88,3828.07) R24.2@4205.35,3819.54 ; C21.2@4254.65,3812.46 ccw(c4246.12,3803.93) 4246.12,3816 ccw(c4246.12,3828.07) C21.2@4254.65,3819.54 ; C21.2@4256.46,3812.46 cw(c4247.93,3803.93) 4260,3803.93 cw(c4272.07,3803.93) C21.2@4263.54,3812.46 ; C21.2@4265.35,3812.46 cw(c4273.88,3803.93) 4273.88,3816 cw(c4273.88,3828.07) C21.2@4265.35,3819.54 ; v1(4382,3815) 4381,3816 C21.2@4260,3816 ; v1(4510,3190) 4550,3190 4575,3165 v1(4575,2890) ; v1@4515.3,3184.7 cw(c4528.11,3171.89) 4528.11,3190 cw(c4528.11,3208.11) v1@4515.3,3195.3 ; v1@4569.7,2895.3 ccw(c4556.89,2908.11) 4575,2908.11 ccw(c4593.11,2908.11) v1@4580.3,2895.3
5V: BAT_O.1 BAT_O.2 C10.1 C11.2 D1.2 LED_L.1 LED_R.1 PIO.1 PIO.8 R21.2 R485.1 SBUS.2 SERVO_UART.1 U3.3 U4.3 V1.1 V1.3 WHEEL_UART.1 | length 9399.1
  Top Layer w20: v1@3651.18,3826.18 R485.1@3723.28,3826.18 ; v1(3655,4280) SBUS.2@3723.28,4280 3765,4280 3925,4120 4260,4120 ; v1(3670,2975) 3681.18,2986.18 WHEEL_UART.1@3723.28,2986.18 ; SERVO_UART.1@3723.28,3406.18 3723.28,3366.72 3750,3340 PIO.8@3900,3340 3950,3390 4060,3390 4160,3490 4300,3490 4315,3475 4315,3330 ; PIO.1@4000,3040 4000,2935 4055,2880 LED_R.1@4240,2880 ; v1(4230,4405) 4260,4375 4260,4120 ; LED_L.1@4240,3340 4250,3330 4315,3330 ; C10.1@4453,3330 4315,3330 ; V1.1@4750.12,3622.6 4787.6,3622.6 4795,3630 4795,3697.4 ; V1.3@4750.12,3697.4 4795,3697.4 ; C11.2@4840,3699 4838.4,3697.4 4810,3697.4 ; 5205,4125 v1(5205,4395) ; BAT_O.1@5319.67,3300.33 cw(c5355.07,3264.93) 5355.07,3315 ; BAT_O.2@5320,3200 BAT_O.1@5320,3300 5325,3300 5340,3315 5735,3315 ; BAT_O.1@5333.81,3286.19 cw(c5403.36,3216.64) 5403.36,3315 ; R21.2@5584.39,2770.61 ccw(c5558.79,2796.21) 5595,2796.21 ccw(c5631.21,2796.21) R21.2@5605.61,2770.61 ; R21.2@5595,2760 5595,2815 5735,2955 5735,3315 ; D1.2@5689.35,3999.35 ccw(c5677.52,4011.18) D1.2@5694.25,4011.18 ; 4260,4120 4810,4120 ; 4795,3697.4 4810,3697.4 ; 4810,3697.4 4810,4120 ; 4810,4120 5665,4120 5700,4085 5700,4010 5660,3970 5660,3710 5695,3675 5965,3675 5990,3650 5990,3445 5965,3420 5840,3420 5735,3315
  Bottom Layer w20: v1(3650,3825) 3670,3825 ; v1(3655,4280) 3680,4255 v1(3680,3405) 3680,2985 ; v1(3670,2975) 3670,2950 3710,2910 3950,2910 4000,2960 PIO.1@4000,3040 ; U3.3@4170,4405 v1(4230,4405) ; U3.3@4201.77,4398.23 cw(c4218.11,4381.89) v1@4218.11,4405 ; U4.3@5155,4395 v1(5205,4395)
  other v1: 5220,4255
BAT: R20.1 U1.20 | length 1509.5
  Top Layer w10: U1.20@4619.53,3168.58 4698.58,3168.58 v1(4710,3180) ; 4664.33,3168.58 ccw(c4664.33,3225.67) v1@4704.7,3185.3 ; 4688.47,3168.58 ccw(c4688.47,3201.53) v1@4711.77,3178.23 ; 5510,3610 R20.1@5553,3610 ; R20.1@5543.2,3604.7 ccw(c5530.39,3591.89) 5530.39,3610 ccw(c5530.39,3628.11) R20.1@5543.2,3615.3
  Mid-Layer 1 w10: v1@4704.7,3185.3 ccw(c4691.89,3198.11) 4710,3198.11 ccw(c4728.11,3198.11) v1@4715.3,3185.3 ; v1(4710,3180) 4710,3226.55 4795,3311.55 4826.55,3311.55 5300,3785 5470,3785 5500,3755 v1(5500,3620) ; v1@5494.7,3625.3 ccw(c5481.89,3638.11) 5500,3638.11 ccw(c5518.11,3638.11) v1@5505.3,3625.3
BEEP: R6.2 U1.59 | length 1365.2
  Top Layer w10: R6.2@4573.2,3900.7 cw(c4556.77,3884.27) 4580,3884.27 ; v1@4574.7,3855.3 ccw(c4561.89,3868.11) 4580,3868.11 ccw(c4598.11,3868.11) v1@4585.3,3855.3 ; v1(4580,3850) 4580,3907.56 R6.2@4582.5,3910.06 ; 4580,3891.51 cw(c4592.99,3891.51) R6.2@4583.8,3900.7 ; v1@4948.23,3138.23 ccw(c4970.01,3160.01) 4970.01,3129.21 ; v1(4950,3140) 4960.79,3129.21 U1.59@5060.47,3129.21 ; v1@4955.3,3145.3 ccw(c4994.15,3184.15) 4994.15,3129.21
  Mid-Layer 2 w10: v1@4944.7,3145.3 ccw(c4931.89,3158.11) 4950,3158.11 ccw(c4968.11,3158.11) v1@4955.3,3145.3 ; v1@4944.7,3624.7 cw(c4931.89,3611.89) 4950,3611.89 cw(c4968.11,3611.89) v1@4955.3,3624.7 ; v1(4950,3140) v1(4950,3630)
  Bottom Layer w10: v1(4580,3850) 4730,3850 v1(4950,3630) ; v1@4585.3,3844.7 cw(c4598.11,3831.89) 4598.11,3850 cw(c4598.11,3868.11) v1@4585.3,3855.3 ; v1@4942.5,3630 ccw(c4924.39,3630) 4937.2,3642.8 ccw(c4950,3655.61) v1@4950,3637.5
CAN_RX1: U1.61 U3.4 | length 2494.3
  Top Layer w10: v1(4795,3145) 4818.58,3168.58 U1.61@5060.47,3168.58 ; v1@4795,3152.5 ccw(c4795,3170.61) 4807.8,3157.8 ccw(c4820.61,3145) v1@4802.5,3145
  Mid-Layer 2 w10: v1@3949.7,4279.7 cw(c3936.89,4266.89) 3955,4266.89 cw(c3973.11,4266.89) v1@3960.3,4279.7 ; v1@3955,4290 v1(3955,4285) 3955,3975 v1@4785,3145 ; 4765.13,3164.87 ccw(c4795,3194.75) v1@4795,3152.5 ; 4782.2,3147.8 ccw(c4795,3160.61) v1@4795,3142.5
  Bottom Layer w10: v1@3950,4285 3970,4305 ; v1@3962.49,4285.4 cw(c3988.22,4286.78) 3970,4305 ; U3.4@4170,4455 4240,4455 4265,4430 4265,4315 4220,4270 4135,4270 4100,4305 3970,4305 ; U3.4@4205.3,4444.7 cw(c4230.18,4419.82) 4230.18,4455
CAN_RX2: U1.57 U4.4 | length 1936.1
  Top Layer w10: v1@4890,3080 4899.84,3089.84 U1.57@5060.47,3089.84
  Mid-Layer 2 w10: v1@4859.7,4319.7 cw(c4846.89,4306.89) 4865,4306.89 cw(c4883.11,4306.89) v1@4870.3,4319.7 ; v1(4865,4325) 4865,3095 v1(4885,3075) ; v1@4877.5,3075 ccw(c4859.39,3075) 4872.2,3087.8 ccw(c4885,3100.61) v1@4885,3082.5
  Bottom Layer w10: v1(4865,4325) 5065,4325 5085,4345 5085,4430 5100,4445 U4.4@5155,4445 ; v1@4870.3,4319.7 cw(c4883.11,4306.89) 4883.11,4325 cw(c4883.11,4343.11) v1@4870.3,4330.3 ; U4.4@5129.7,4439.7 ccw(c5116.89,4426.89) 5116.89,4445 ccw(c5116.89,4463.11) U4.4@5129.7,4450.3
CAN_TX1: U1.62 U3.1 | length 1837.8
  Top Layer w10: v1(4786.73,3188.27) U1.62@5060.47,3188.27 ; v1@4792.04,3182.96 cw(c4804.84,3170.16) 4804.84,3188.27 cw(c4804.84,3206.37) v1@4792.04,3193.57
  Mid-Layer 2 w10: v1@4164.7,4159.7 cw(c4151.89,4146.89) 4170,4146.89 cw(c4188.11,4146.89) v1@4175.3,4159.7 ; v1@4164.7,4170.3 ccw(c4151.89,4183.11) 4170,4183.11 ccw(c4188.11,4183.11) v1@4175.3,4170.3 ; v1@4164.7,4299.7 cw(c4151.89,4286.89) 4170,4286.89 cw(c4188.11,4286.89) v1@4175.3,4299.7 ; v1(4170,4305) 4170,3805 4760,3215 ; 4775,3200 4760,3215 ; v1(4786.73,3188.27) 4760,3215 ; 4773.93,3201.07 ccw(c4786.73,3213.87) 4786.73,3195.77 cw(c4786.73,3213.87) 4773.93,3201.07 ; 4773.93,3201.07 cw(c4761.13,3188.27) 4779.23,3188.27 ccw(c4761.13,3188.27) 4773.93,3201.07
  other v1: 4170,4165
CAN_TX2: U1.58 U4.1 | length 1715.6
  Top Layer w10: v1(4895,3125) 4910.47,3109.53 U1.58@5060.47,3109.53
  Mid-Layer 2 w10: v1@4889.7,3130.3 ccw(c4876.89,3143.11) 4895,3143.11 ccw(c4913.11,3143.11) v1@4900.3,3130.3 ; v1@4889.7,4289.7 cw(c4876.89,4276.89) 4895,4276.89 cw(c4913.11,4276.89) v1@4900.3,4289.7 ; v1(4895,3125) 4895,3165 4895,3210 v1(4895,4295)
  Bottom Layer w10: v1(4895,4295) U4.1@5155,4295 ; v1@4900.3,4289.7 cw(c4913.11,4276.89) 4913.11,4295 cw(c4913.11,4313.11) v1@4900.3,4300.3 ; U4.1@5129.7,4289.7 ccw(c5116.89,4276.89) 5116.89,4295 ccw(c5116.89,4313.11) U4.1@5129.7,4300.3
CS_FLASH: U1.41 U2.1 | length 1359.9
  Top Layer w10: U1.41@4849.84,2859.53 4849.84,2969.84 v1(4850,2970) ; v1@5389.7,3745.3 ccw(c5376.89,3758.11) 5395,3758.11 ccw(c5413.11,3758.11) v1@5400.3,3745.3 ; U2.1@5390.88,3799.9 cw(c5380.93,3789.95) 5395,3789.95 cw(c5409.07,3789.95) U2.1@5399.12,3799.9 ; v1(5395,3740) U2.1@5395,3821.73
  Mid-Layer 1 w10: v1@4844.7,2975.3 ccw(c4831.89,2988.11) 4850,2988.11 ccw(c4868.11,2988.11) v1@4855.3,2975.3 ; v1(4850,2970) 4850,3260 5265,3675 5375,3675 5395,3695 v1(5395,3740) ; v1@5389.7,3734.7 cw(c5376.89,3721.89) 5395,3721.89 cw(c5413.11,3721.89) v1@5400.3,3734.7
CS_IMU: ICM1.5 U1.21 | length 980.6
  Top Layer w10: U1.21@4619.53,3148.9 4731.1,3148.9 v1(4735,3145) ; v1(5020,2660) 5085,2660 5126.26,2701.26 ICM1.5@5140,2701.26 ; v1@5025.3,2654.7 cw(c5038.11,2641.89) 5038.11,2660 cw(c5038.11,2678.11) v1@5025.3,2665.3
  Mid-Layer 1 w10: v1@4729.7,3139.7 cw(c4716.89,3126.89) 4735,3126.89 cw(c4753.11,3126.89) v1@4740.3,3139.7 ; v1(4735,3145) 4735,2930 4879.06,2785.94 4879.06,2735.94 4955,2660 v1(5020,2660) ; v1@5014.7,2654.7 ccw(c5001.89,2641.89) 5001.89,2660 ccw(c5001.89,2678.11) v1@5014.7,2665.3
DM: U1.44 USB_L1.1 | length 2583.3
  Top Layer w10: v1@4904.7,2929.7 cw(c4894.55,2919.55) 4908.9,2919.55 ; U1.44@4908.9,2859.53 4908.9,2928.9 v1@4915,2935 ; 4908.9,2914.23 cw(c4930.77,2914.23) v1@4915.3,2929.7 ; v1(5755,3800) v1@5756.89,3801.89 ; v1(5765,3920) USB_L1.1@5880,3920 ; v1@5770.3,3914.7 cw(c5783.11,3901.89) 5783.11,3920 cw(c5783.11,3938.11) v1@5770.3,3925.3 ; USB_L1.1@5856.48,3915.18 ccw(c5844.86,3903.56) 5844.86,3920 ccw(c5844.86,3936.44) USB_L1.1@5856.48,3924.82
  Mid-Layer 1 w10: v1@4915,2935 5085,2935 5155,2865 5155,2740 5170,2725 5660,2725 5740,2805 5740,3740 5740,3765 ; v1@4915.3,2929.7 cw(c4928.11,2916.89) 4928.11,2935 cw(c4928.11,2953.11) v1@4915.3,2940.3 ; v1@5749.7,3805.3 ccw(c5712.75,3842.25) 5765,3842.25 ; v1(5755,3800) 5740,3785 5740,3765 ; v1@5756.77,3798.23 ccw(c5736.89,3818.11) 5765,3818.11 ; v1@5759.7,3914.7 cw(c5746.89,3901.89) 5765,3901.89 cw(c5783.11,3901.89) v1@5770.3,3914.7 ; v1(5765,3920) 5765,3790 5740,3765
  other v1: 4910,2935
DP: U1.45 USB_L1.2 | length 2462.2
  Top Layer w10: v1(4915,2785) 4928.58,2798.58 U1.45@4928.58,2859.53 ; v1(5800,3880) 5800.63,3880.63 USB_L1.2@5880,3880.63 ; v1@5805.3,3874.7 cw(c5819.63,3860.37) 5819.63,3880.63 ; v1@5805.3,3885.3 ccw(c5816.59,3896.59) 5816.59,3880.63 ; USB_L1.2@5856.48,3875.81 ccw(c5844.86,3864.19) 5844.86,3880.63 ccw(c5844.86,3897.07) USB_L1.2@5856.48,3885.45
  Mid-Layer 1 w10: v1(4915,2785) 4995,2865 5110,2865 5130,2845 5130,2730 5155,2705 5685,2705 5770,2790 5770,3740 ; v1@4915,2792.5 ccw(c4915,2810.61) 4927.8,2797.8 ccw(c4940.61,2785) v1@4922.5,2785 ; 5785,3765 5770,3750 ; v1@5794.7,3874.7 cw(c5781.89,3861.89) 5800,3861.89 cw(c5818.11,3861.89) v1@5805.3,3874.7 ; v1(5800,3880) 5800,3780 5770,3750 ; 5770,3740 5770,3750 ; 5770,3740 5770,3750
GND: BAT.2 BAT_O.3 BAT_O.4 C1.2 C2.1 C3.2 C4.2 C5.1 C6.1 C7.1 C8.2 C9.2 C10.2 C11.1 C12.2 C13.2 C14.2 C15.2 C16.2 C17.2 C18.2 C19.1 C20.1 C21.1 C27.2 CAN1.2 CAN2.2 CAN3.2 CAN4.2 D2.3 D3.3 DS1.2 DS2.2 ICM1.8 ICM1.9 ICM1.10 ICM1.11 ICM1.12 ICM1.13 ICM1.15 LED_C.1 LED_L.3 LED_R.3 LED_S.1 P2.3 P3.1 PIO.2 PIO.10 Q1.1 Q2.1 R1.1 R4.1 R7.1 R19.1 R22.1 R485.2 RST.2 SBUS.3 SERVO_UART.2 SWD1.4 U1.12 U1.18 U1.63 U2.4 U3.2 U3.8 U4.2 U4.8 U5.5 USB_L1.4 V1.2 WHEEL_UART.2 | length 6634.6
  Top Layer w10: v1@4520,3222.5 cw(c4520,3204.39) 4532.8,3217.2 cw(c4545.61,3230) v1@4527.5,3230 ; v1(4520,3230) 4542.05,3207.95 U1.18@4619.53,3207.95 ; 4755,3200 v1@4780,3225 ; 4760.13,3205.13 ccw(c4730.25,3235) v1@4772.5,3235 ; 4771.1,3250.45 ccw(c4795.45,3250.45) v1@4778.23,3233.23 ; U1.12@4771.1,3274.59 ccw(c4819.59,3274.59) v1@4785.3,3240.3 ; U1.12@4771.1,3300.47 4771.1,3243.9 v1(4780,3235) ; 4777.2,3222.2 ccw(c4764.39,3235) v1@4782.5,3235
  Top Layer w80: CAN2.2@4048.58,4401.57 4152.01,4505 4350,4505 4453.43,4401.57 CAN1.2@4528.58,4401.57 CAN3.2@5008.58,4401.57 5056.57,4401.57 5150,4495 5415.16,4495 CAN4.2@5508.58,4401.57 ; 4387.58,4467.42 ccw(c4511.82,4591.66) CAN1.2@4527.25,4416.63 ; CAN3.2@5008.58,4416.69 ccw(c5008.58,4569.05) 5116.32,4461.32
  Bottom Layer w40: CAN2.2@4048.58,4401.57 4048.58,4428.58 4125,4505 ; CAN2.2@4083.69,4402.3 cw(c4224.78,4405.21) 4125,4505 ; 4454.6,4495.4 cw(c4360.78,4401.57) CAN1.2@4493.46,4401.57 ; CAN1.2@4528.58,4401.57 4528.58,4421.42 4445,4505 4125,4505 ; CAN3.2@5008.58,4401.57 5008.58,4423.58 5090,4505 5445,4505 5508.58,4441.42 CAN4.2@5508.58,4401.57 ; CAN3.2@5043.7,4401.57 cw(c5181.62,4401.57) 5084.09,4499.1 ; BAT_O.4@5320,3000 BAT_O.3@5320,3100 5408.9,3100 ; 5425.08,4524.92 cw(c5308.05,4407.88) CAN4.2@5473.48,4402.68 ; BAT.2@5452.2,3021.57 ccw(c5367.42,3021.57) 5427.37,3081.53 ccw(c5487.32,3141.48) BAT.2@5487.32,3056.69 ; BAT.2@5465.75,3000 BAT.2@5487.32,3021.57 5408.9,3100 ; 5490.45,4459.55 cw(c5434.79,4403.89) CAN4.2@5513.46,4401.42 ; CAN4.2@5508.58,4406.46 cw(c5508.58,4309.98) 5576.8,4378.2 ; CAN4.2@5553.43,4401.57 5625,4330 5625,4070 5595,4040 5425,4040 5295,3910 5295,3590 5410,3475 5410,3315 5388.9,3293.9 5388.9,3120 5408.9,3100
  Bottom Layer w80: CAN1.2@4528.58,4401.57 CAN3.2@5008.58,4401.57
  other v1: 4420,2700 4240,2745 4610,2845 4350,2890 4110,2985 4810,3005 4380,3020 4900,3020 4110,3065 4810,3080 4325,3175 4125,3210 3795,3230 4350,3285 4560,3285 5500,3365 4370,3375 5500,3410 4370,3435 5460,3530 4775,3540 5375,3625 3875,3635 3995,3635 4115,3635 5610,3705 4675,3785 5610,3850 5510,3860 4715,3915 5465,3955 5760,3960 5160,3985 5240,3985 4315,4010 5760,4040 4525,4080 4225,4160 5135,4185 4405,4280
GROUND1: PIO.9 U1.8 | length 1161.2
  Top Layer w10: v1(4815,3220) 4835,3220 4849.84,3234.84 U1.8@4849.84,3300.47 ; v1@4820.3,3214.7 cw(c4833.11,3201.89) 4833.11,3220 cw(c4833.11,3238.11) v1@4820.3,3225.3
  Mid-Layer 2 w10: v1(4540,3495) 4570,3495 4815,3250 v1(4815,3220) ; v1@4545.3,3489.7 cw(c4558.11,3476.89) 4558.11,3495 cw(c4558.11,3513.11) v1@4545.3,3500.3 ; v1@4809.7,3225.3 ccw(c4796.89,3238.11) 4815,3238.11 ccw(c4833.11,3238.11) v1@4820.3,3225.3
  Bottom Layer w10: PIO.9@4000,3440 4045,3485 4530,3485 v1(4540,3495)
GROUND2: PIO.7 U1.9 | length 1259.2
  Top Layer w10: v1@4824.85,3359.54 cw(c4812.05,3346.74) 4830.16,3346.74 cw(c4848.26,3346.74) v1@4835.46,3359.54 ; U1.9@4830.16,3300.47 v1(4830.16,3364.84)
  Mid-Layer 1 w10: PIO.7@4000,3340 4050,3340 ; PIO.7@4011.49,3331.11 cw(c4029.61,3317.08) 4029.61,3340 cw(c4029.61,3362.92) PIO.7@4011.49,3348.89 ; PIO.7@4019.4,3324.99 cw(c4050,3301.31) 4050,3340 ; PIO.7@4019.4,3355.01 ccw(c4050,3378.69) 4050,3340 ; v1@4824.85,3370.15 ccw(c4812.05,3382.95) 4830.16,3382.95 ccw(c4848.26,3382.95) v1@4835.46,3370.15 ; v1(4830.16,3364.84) 4830.16,3400 4830.16,3404.84 4810,3425 4595,3425 4375,3205 4185,3205 4050,3340
GROUND3: U1.10
GROUND4: U1.11
GROUND5: U1.24
GROUND6: U1.25
INT: ICM1.6
LED1: R8.1 U1.56 | length 1648.3
  Top Layer w10: v1(5040,3685) 5072.97,3717.97 R8.1@5074.94,3717.97 ; v1@5040,3692.5 ccw(c5040,3710.61) 5052.8,3697.8 ccw(c5065.61,3685) v1@5047.5,3685 ; U1.56@5060.47,3070.16 5115.16,3070.16 5135,3090 v1(5135,3100) ; 5120.16,3075.16 ccw(c5101.2,3094.11) v1@5127.61,3098.71
  Mid-Layer 2 w10: v1(5040,3685) 5175,3820 5400,3820 5440,3780 5440,3710 5400,3670 5200,3670 5135,3605 v1(5135,3100) ; v1@5040,3692.5 ccw(c5040,3710.61) 5052.8,3697.8 ccw(c5065.61,3685) v1@5047.5,3685 ; v1@5129.7,3105.3 ccw(c5116.89,3118.11) 5135,3118.11 ccw(c5153.11,3118.11) v1@5140.3,3105.3